# EAGLE board Planta Inteligente (EAGLE 9.7.0)

Size 249.88 x 154 mm. Coordinates in mm from the lower left corner, seen from the top.
Outline: 0,0 249.88,0 249.88,154 0,154 0,0
Copper layers (1*16): Top 0.035mm / dielectric 1.5mm / Bottom 0.035mm
Design rules "default": minimum track width 6mil, minimum drill 0.35mm, track to track 6mil, track to pad 6mil, pad to pad 6mil, via to via 6mil, smd to smd 6mil, copper to edge 40mil, drill to drill 6mil, minimum pad ring 10mil, minimum via ring 8mil, stop-mask expansion 4mil, vias tented up to drill 0mil, thermal gap 10mil

## Footprints (pad centres in the part's own frame; a part is rotated, then mirrored left to right if it is on the bottom)
LEDRD254W60D565H860B = drill 0.981 pad 1.581: 1 -1.27,0; 2 1.27,0
LEDRD254W60D565H860B_Y = drill 0.981 pad 1.581: 1 -1.27,0; 2 1.27,0
LEDRD254W60D565H860B_G = drill 0.981 pad 1.581: 1 -1.27,0; 2 1.27,0
LEDRD254W60D565H860B_B = drill 0.981 pad 1.581: 1 -1.27,0; 2 1.27,0
PIEZO = drill 1 pad 1.6: 1 -3.5,0; 2 3.5,0
GL5528 = drill 0.8 pad 1.4: 1 -1.702,0; 2 1.702,0
RESAD1016W63L850D250B = drill 0.83 pad 1.43: 1 -5.08,0; 2 5.08,0
SWITCH-MOMENTARY-PTH-6.5MM = drill 1.016 pad 1.88: 1 -3.251,2.261; 2 3.251,2.261; 3 -3.251,-2.261; 4 3.251,-2.261
SEN-13322 = drill 1.016 long: 1 -2.54,0; 2 0,0; 3 2.54,0
ARDUINO-UNO-R3-SHIELD = drill 1.016 pad 1.88: 3.3V 24.13,-2.54; 5V 24.13,0; A0 24.13,12.7; A1 24.13,15.24; A2 24.13,17.78; A3 24.13,20.32; A4 24.13,22.86; A5 24.13,25.4; AREF -24.13,-13.97; D2 -24.13,20.32; D3 -24.13,17.78; D4 -24.13,15.24; D5 -24.13,12.7; D6 -24.13,10.16; D7 -24.13,7.62; D8 -24.13,3.81; D9 -24.13,1.27; D10 -24.13,-1.27; D11 -24.13,-3.81; D12 -24.13,-6.35; D13 -24.13,-8.89; GND@0 24.13,2.54; GND@1 24.13,5.08; GND@2 -24.13,-11.43; IOREF 24.13,-7.62; NC 24.13,-10.16; RES 24.13,-5.08; RX -24.13,25.4; SCL -24.13,-19.05; SDA -24.13,-16.51; TX -24.13,22.86; VIN 24.13,7.62
LCD-I2C = drill 1.016 long: 1 -19.05,-5.08; 2 -19.05,-7.62; 3 -19.05,-10.16; 4 -19.05,-12.7

## Placement (x,y rotation side)
D1  RED  [LEDRD254W60D565H860B]  178.1,60.26 180 top
D2  YELLOW  [LEDRD254W60D565H860B_Y]  185.72,60.26 180 top
D3  GREEN  [LEDRD254W60D565H860B_G]  193.34,60.26 180 top
D4  BLUE  [LEDRD254W60D565H860B_B]  200.96,60.26 180 top
PIEZO6  PIEZO  [PIEZO]  198.92,140.42 0 top
R1  PHOTOCELL_GL5528  [GL5528]  94.28,88.2 0 top
R2  1k  [RESAD1016W63L850D250B]  100.63,85.66 180 top
R3  1k  [RESAD1016W63L850D250B]  179.37,72.96 90 top
R4  1k  [RESAD1016W63L850D250B]  186.99,72.96 90 top
R5  1k  [RESAD1016W63L850D250B]  194.61,72.96 90 top
R6  1k  [RESAD1016W63L850D250B]  202.23,72.96 90 top
R11  100  [RESAD1016W63L850D250B]  179.74,140.38 0 top
S1  SWITCH_MOMENTARY  [SWITCH-MOMENTARY-PTH-6.5MM]  141.27,81.85 270 top
S3  SWITCH_MOMENTARY  [SWITCH-MOMENTARY-PTH-6.5MM]  133.65,81.85 270 top
SEN2  SEN-13322  [SEN-13322]  116.02,37.19 0 top
U1  ARDUINO-UNO-R3-SHIELD  [ARDUINO-UNO-R3-SHIELD]  47.88,75.78 270 top
U4  LCD-16X2-I2CSUNFOUNDER-IIC  [LCD-I2C]  194.26,36.63 0 top

## Library data of the parts
D1 = Tinkercad; CATEGORY: Opto-Electronic; SUB-CATEGORY: LED; VALUE: LED_RED
D2 = Tinkercad; CATEGORY: Opto-Electronic; SUB-CATEGORY: LED; VALUE: LED_YELLOW
D3 = Tinkercad; CATEGORY: Opto-Electronic; SUB-CATEGORY: LED; VALUE: LED_GREEN
D4 = Tinkercad; CATEGORY: Opto-Electronic; SUB-CATEGORY: LED; VALUE: LED_BLUE
PIEZO6 R1-R6 R11 S1 S3 SEN2 U1 U4 = Tinkercad

## Nets
D1_A: D1.1 R3.1
D2_A: D2.1 R4.1
D3_A: D3.1 R5.1
D4_A: D4.1 R6.1
PIEZO6_1: PIEZO6.1 R11.2
R1_2: R1.2 R2.2
U1_5V: R2.1 U1.5V U4.2
U1_A0: SEN2.1 U1.A0
U1_A1: SEN2.3 U1.A1
U1_A2: R1.1 U1.A2
U1_D2: S3.3 S3.4 U1.D2
U1_D3: S1.3 S1.4 U1.D3
U1_D7: R11.1 U1.D7
U1_D8: R3.2 U1.D8
U1_D9: R4.2 U1.D9
U1_D10: R5.2 U1.D10
U1_D11: R6.2 U1.D11
U1_GND: D1.2 D2.2 D3.2 D4.2 PIEZO6.2 S1.1 S1.2 S3.1 S3.2 SEN2.2 U1.GND@0 U1.GND@1 U1.GND@2 U4.1
U1_SCL: U1.SCL U4.4
U1_SDA: U1.SDA U4.3

## Tracks (layer width: path | path; a pad name or v marks a point on that pad's centre or on a via)
D1_A  (1 unrouted)
D2_A  (1 unrouted)
D3_A  (1 unrouted)
D4_A  (1 unrouted)
PIEZO6_1  (1 unrouted)
R1_2  (1 unrouted)
U1_5V  (2 unrouted)
U1_A0  (1 unrouted)
U1_A1  (1 unrouted)
U1_A2  (1 unrouted)
U1_D2  (2 unrouted)
U1_D3  (2 unrouted)
U1_D7  (1 unrouted)
U1_D8  (1 unrouted)
U1_D9  (1 unrouted)
U1_D10  (1 unrouted)
U1_D11  (1 unrouted)
U1_GND  (13 unrouted)
U1_SCL  (1 unrouted)
U1_SDA  (1 unrouted)